# Altium PCB 9-Safety-Relay-PCB.PcbDoc
Units mm, origin at the board's own origin, x right, y up, seen from the top; angles counter-clockwise.
Board outline 160.02 x 88.58 mm, 2 copper layers (Top Layer, Bottom Layer); 13 components, 41 nets, 146 pads, 16 vias.
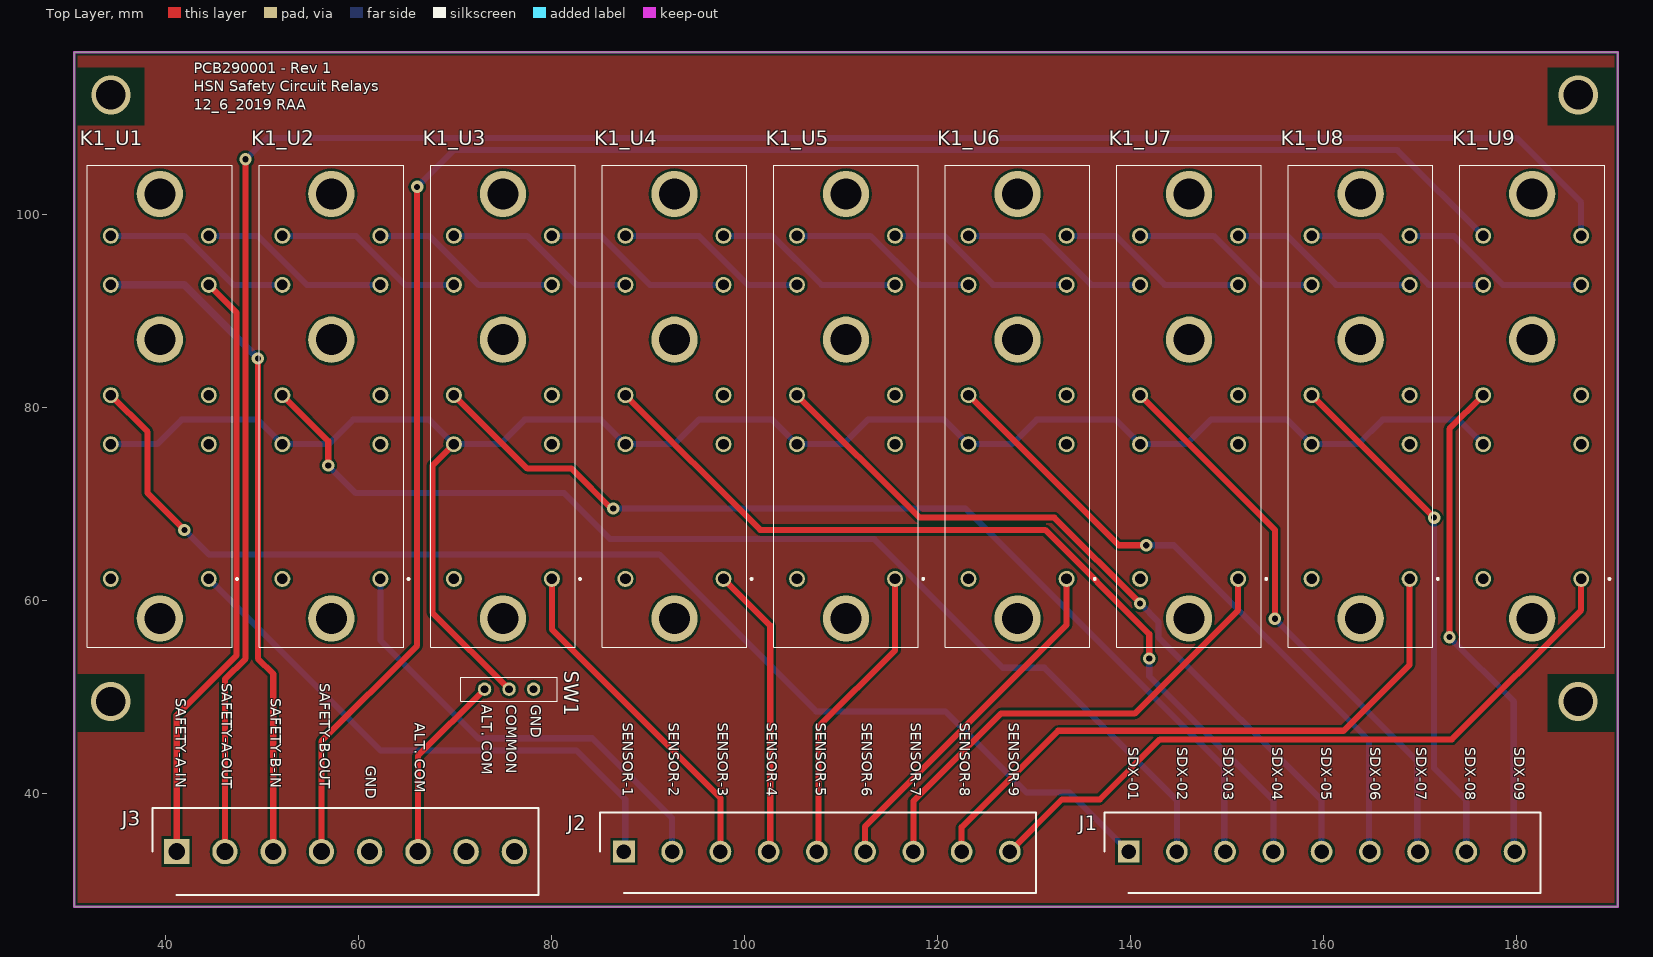
[diagram p0: Top Layer view]
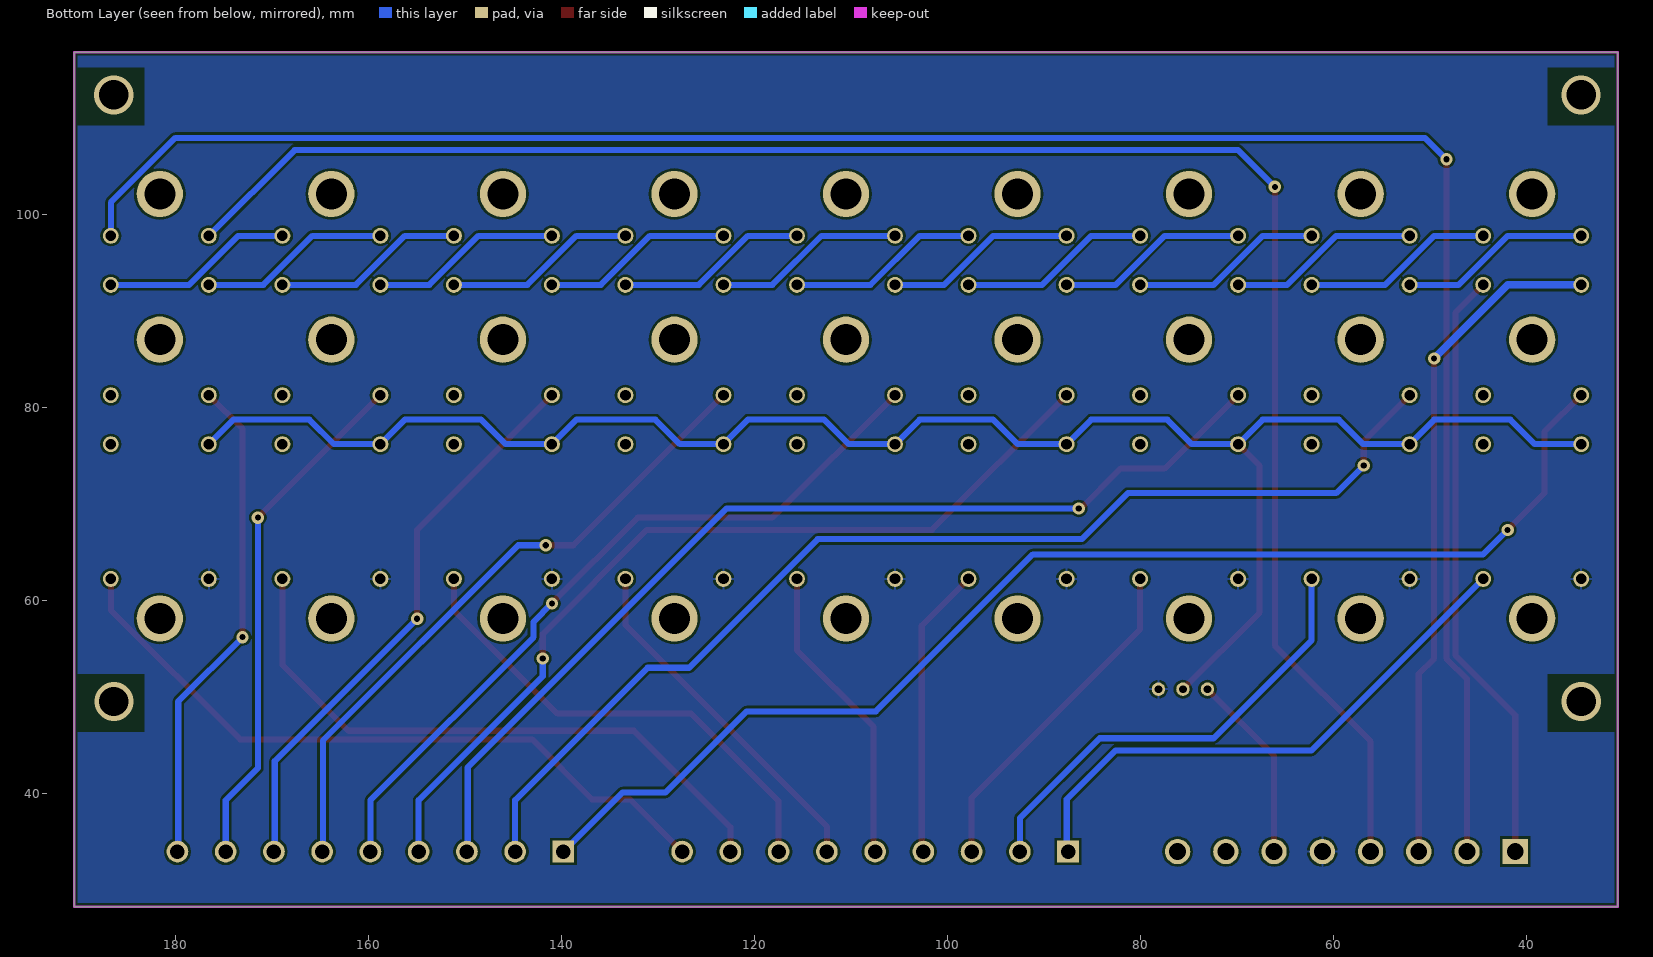
[diagram p1: Bottom Layer view, seen from below]
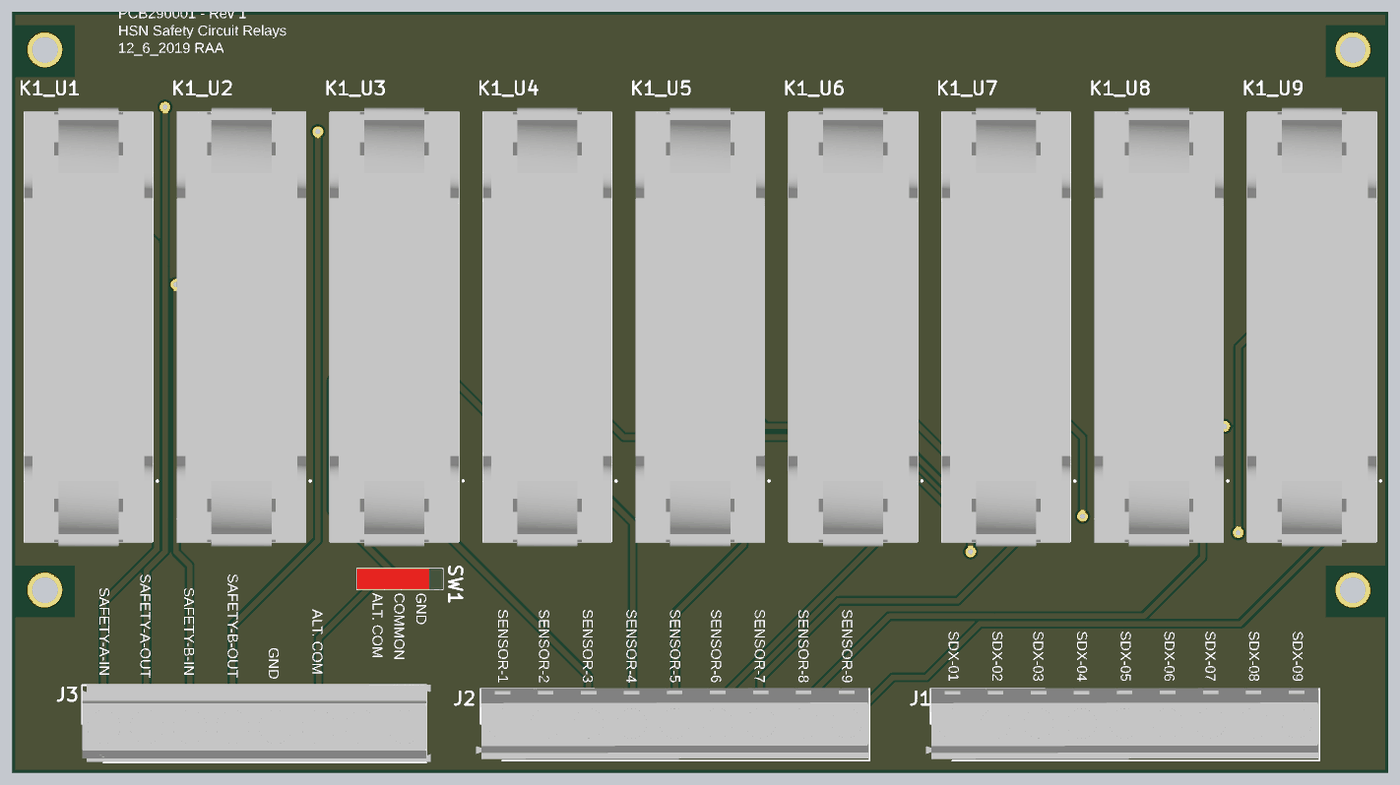
[diagram p2: 3D render of the assembled board from above, using the file's embedded part models]

## Layer stack, top to bottom
Top Solder: solder mask 0.0102, Solder Resist, Dk 3.5
Top Layer: signal copper 0.0356
Dielectric 1: dielectric 0.32, FR-4, Dk 4.8
Bottom Layer: signal copper 0.0356
Bottom Solder: solder mask 0.0102, Solder Resist, Dk 3.5

## Board outline
30.48,116.84 190.5,116.84 190.5,28.258 30.48,28.258

## Design rules (kind name [scope] priority, off if disabled: settings)
Clearance [All] p1: gap=0.254 ignorepadtopadclearanceinfootprint=FALSE except(0: Arc-Hole Track-Hole SMDPad-Hole THPad-Hole Via-Hole Fill-Hole Poly-Hole Region-Hole Text-Hole)
PolygonConnect [All] p1: connectstyle=Relief reliefconductorwidth=0.254 reliefentries=4 polygonreliefangle="90 Angle" airgapwidth=0.254
RoutingVias [All] p1: holewidth=0.635 width=1.27 viastyle="Through Hole" minholewidth=0.254 minwidth=1.016 maxholewidth=1.27 maxwidth=2.54
SolderMaskExpansion [All] p1: expansion=0.102
Width [All] p1: maxlimit=3.81 minlimit=0.254 preferedwidth=0.635 minimp=50.000000 maximp=50.000000 favimp=50.000000
30 further rules are at their usual default settings.

## Classes and differential pairs
component class U9: K1_U9
component class U8: K1_U8
channel class Safety-Relay-SubSch: U1 U2 U3 U4 U5 U6 U7
component class U7: K1_U7
component class U6: K1_U6
component class U5: K1_U5
component class U4: K1_U4
component class U3: K1_U3
component class U2: K1_U2
component class U1: K1_U1
component class Safety-Relay-Schematic: J3 SW1

## Components (designator, comment, footprint, x,y, rotation, side; value= is the part's Value field where it differs from the comment)
J1 "282836-9" SHDR9W130P0X500_1X9_4500X820X1020P 139.782,33.972 r0 top
J2 "282836-9" SHDR9W130P0X500_1X9_4500X820X1020P 87.472,33.972 r0 top
J3 "796683-8" SHDR8W110P0X500_1X8_4000X900X1520P 41.12,33.972 r0 top
K1_U1 "P7SA-10P_(G7SA-3A1B)" P7SA10PG7SA2A2B 39.37,80.13 r90 top (schematic designator K1)
K1_U2 "P7SA-10P_(G7SA-3A1B)" P7SA10PG7SA2A2B 57.15,80.13 r90 top (schematic designator K1)
K1_U3 "P7SA-10P_(G7SA-3A1B)" P7SA10PG7SA2A2B 74.93,80.13 r90 top (schematic designator K1)
K1_U4 "P7SA-10P_(G7SA-3A1B)" P7SA10PG7SA2A2B 92.71,80.13 r90 top (schematic designator K1)
K1_U5 "P7SA-10P_(G7SA-3A1B)" P7SA10PG7SA2A2B 110.49,80.13 r90 top (schematic designator K1)
K1_U6 "P7SA-10P_(G7SA-3A1B)" P7SA10PG7SA2A2B 128.27,80.13 r90 top (schematic designator K1)
K1_U7 "P7SA-10P_(G7SA-3A1B)" P7SA10PG7SA2A2B 146.05,80.13 r90 top (schematic designator K1)
K1_U8 "P7SA-10P_(G7SA-3A1B)" P7SA10PG7SA2A2B 163.83,80.13 r90 top (schematic designator K1)
K1_U9 "P7SA-10P_(G7SA-3A1B)" P7SA10PG7SA2A2B 181.61,80.13 r90 top (schematic designator K1)
SW1 "450301014042" 450301014042 75.565,50.8 r0 top

## Footprints (in the part's own frame and the unit in brackets; to place one, negate y for a bottom-side part, rotate by r counter-clockwise, add the part's x,y. Pads: shape width x height; smd on the part's side, far side on the other; paste and mask are expansions set on the pad)
450301014042 [mm] "10mm*2.5mm. SPDT, ON-ON, 2.54mm, horizontal type, THT, bulk"
  round 1.4 hole 0.8: 1(0,0) 2(-2.54,0) 3(2.54,0)
  silkscreen extent -5,-1.25 5,1.25, body extent -5,-1.25 5,1.25, height 6.4
P7SA10PG7SA2A2B [mm]
  round 1.65 hole 1.1: 1(-17.9,-5.08) 2(-3.93,-5.08) 3(1.15,-5.08) 4(12.58,-5.08) 5(17.66,-5.08) 6(17.66,5.08) 7(12.58,5.08) 8(1.15,5.08) 9(-3.93,5.08) 10(-17.9,5.08)
  round 4.8 hole 3.2: MH1(-22,0) MH2(6.9,0) MH3(22,0)
  silkscreen extent -25,-8.1 25,7.5, body extent -25.5,-7.5 25.51,7.5, height 40.71
SHDR8W110P0X500_1X8_4000X900X1520P [mm]
  rect 2.625x2.625 hole 1.75: 1(0,0)
  round 2.625 hole 1.75: 2(5,0) 3(10,0) 4(15,0) 5(20,0) 6(25,0) 7(30,0) 8(35,0)
  silkscreen extent -2.5,-4.5 37.5,4.5, body extent -2.47,-4.43 38.03,4.57, height 15.01
SHDR9W130P0X500_1X9_4500X820X1020P [mm]
  rect 2.25x2.25 hole 1.5: 1(0,0)
  round 2.25 hole 1.5: 2(5,0) 3(10,0) 4(15,0) 5(20,0) 6(25,0) 7(30,0) 8(35,0) 9(40,0)
  silkscreen extent -2.5,-4.3 42.7,4.05, body extent -3.05,-4.1 42.56,4.17, height 10

## Part data
J1 J2: "Connector", Manufacturer_Name="TE Connectivity", Mouser Part Number=571-282836-9, RS Part Number=3617746, Allied_Number=70285523, Allied Price/Stock=https://www.alliedelec.com/te-connectivity-282836-9/70285523/, Datasheet Link=http://www.te.com/commerce/DocumentDelivery/DDEController?Action=srchrtrv&DocNm=282836&DocType=Customer+Drawing&DocLang=English, Height=10.2mm, Manufacturer_Part_Number=282836-9, Mouser Price/Stock=https://www.mouser.com/Search/Refine.aspx?Keyword=571-282836-9, RS Price/Stock=http://uk.rs-online.com/web/p/products/3617746
J3: "Connector", Manufacturer_Name="TE Connectivity", Mouser Part Number=571-796683-8, Datasheet Link=http://www.te.com/commerce/DocumentDelivery/DDEController?Action=srchrtrv&DocNm=796683&DocType=Customer+Drawing&DocLang=English, Height=15.2mm, Manufacturer_Part_Number=796683-8, Mouser Price/Stock=https://www.mouser.com/Search/Refine.aspx?Keyword=571-796683-8
K1_U1 K1_U2 K1_U3 K1_U4 K1_U5 K1_U6 K1_U7 K1_U8 K1_U9: "Relay or Contactor", Manufacturer_Name="Omron Electronics", Manufacturer_Part_Number="P7SA-10P (G7SA-3A1B)", Mouser Part Number=653-P7SA-10P, Allied_Number=70033653, Allied Price/Stock=https://www.alliedelec.com/omron-safety-sti-p7sa-10p/70033653/, Datasheet Link=http://www.ia.omron.com/data_pdf/cat/g7sa_j120-e1_12_1_csm1269.pdf, Mouser Price/Stock=https://www.mouser.com/Search/Refine.aspx?Keyword=653-P7SA-10P
SW1: library part CMP-1466-00001-1, "WS-SLTV 10mm*2.5mm, SPDT, ON-ON, 2.54mm, straight type, THT, Mini Slide Switch, 3 pins", Manufacturer="Wuerth Elektronik", ComponentLink1Description="Manufacturer URL", ComponentLink1URL=http://www.we-online.com, ComponentLink2Description=Datasheet, ComponentLink2URL=http://katalog.we-online.de/em/datasheet/450301014042.pdf, NoPins=06, PackageReference=450301014042, PartNumber=450301014042

## Via types
v1: diameter 1.27, hole 0.635, Top Layer to Bottom Layer, 12 vias
v2: diameter 4.064, hole 3.048, Top Layer to Bottom Layer, 4 vias

## Nets (pads, with @x,y where several pads share a name; then routed paths per layer and width w, separated by ;. In a path a pad name is that pad's centre, name@x,y a point inside that pad or via, vN(x,y) a via of type N, cw(c..) or ccw(c..) an arc to the next point about the centre after c; other vN are vias at no path point)
COM-IN: J3.6 SW1.2 | length 19.7
  Top Layer w0.635: J3.6 66.12,43.895 SW1.2
COMMON: K1_U1.9 K1_U2.9 K1_U3.9 K1_U4.9 K1_U5.9 K1_U6.9 K1_U7.9 K1_U8.9 K1_U9.9 SW1.1 | length 188.7
  Top Layer w0.635: K1_U3.9 67.627,73.977 67.627,58.737 SW1.1
  Bottom Layer w0.635: K1_U1.9 39.098,76.2 41.638,78.74 49.53,78.74 K1_U2.9 56.878,76.2 59.418,78.74 67.31,78.74 K1_U3.9 74.658,76.2 77.198,78.74 85.09,78.74 K1_U4.9 92.71,76.2 95.25,78.74 102.87,78.74 K1_U5.9 110.218,76.2 112.758,78.74 120.65,78.74 K1_U6.9 127.709,76.2 130.249,78.74 138.43,78.74 K1_U7.9 145.778,76.2 148.318,78.74 156.21,78.74 K1_U8.9 163.558,76.2 166.098,78.74 173.99,78.74 K1_U9.9
GND: J3.5 K1_U1.10 K1_U2.10 K1_U3.10 K1_U4.10 K1_U5.10 K1_U6.10 K1_U7.10 K1_U8.10 K1_U9.10 SW1.3
NetK1_U1_5: K1_U1.5 K1_U2.4 | length 19.9
  Bottom Layer w0.635: K1_U1.5 49.53,97.79 54.61,92.71 K1_U2.4
NetK1_U1_6: K1_U1.6 K1_U2.7 | length 19.9
  Bottom Layer w0.635: K1_U1.6 41.91,97.79 46.99,92.71 K1_U2.7
NetK1_U2_5: K1_U2.5 K1_U3.4 | length 19.9
  Bottom Layer w0.635: K1_U2.5 67.31,97.79 72.39,92.71 K1_U3.4
NetK1_U2_6: K1_U2.6 K1_U3.7 | length 19.9
  Bottom Layer w0.635: K1_U2.6 59.69,97.79 64.77,92.71 K1_U3.7
NetK1_U3_5: K1_U3.5 K1_U4.4 | length 19.9
  Bottom Layer w0.635: K1_U3.5 85.09,97.79 90.17,92.71 K1_U4.4
NetK1_U3_6: K1_U3.6 K1_U4.7 | length 19.9
  Bottom Layer w0.635: K1_U3.6 77.47,97.79 82.55,92.71 K1_U4.7
NetK1_U4_5: K1_U4.5 K1_U5.4 | length 19.9
  Bottom Layer w0.635: K1_U4.5 102.87,97.79 107.95,92.71 K1_U5.4
NetK1_U4_6: K1_U4.6 K1_U5.7 | length 19.9
  Bottom Layer w0.635: K1_U4.6 95.25,97.79 100.33,92.71 K1_U5.7
NetK1_U5_5: K1_U5.5 K1_U6.4 | length 19.9
  Bottom Layer w0.635: K1_U5.5 120.65,97.79 125.73,92.71 K1_U6.4
NetK1_U5_6: K1_U5.6 K1_U6.7 | length 19.9
  Bottom Layer w0.635: K1_U5.6 113.03,97.79 118.11,92.71 K1_U6.7
NetK1_U6_5: K1_U6.5 K1_U7.4 | length 19.9
  Bottom Layer w0.635: K1_U6.5 138.43,97.79 143.51,92.71 K1_U7.4
NetK1_U6_6: K1_U6.6 K1_U7.7 | length 19.9
  Bottom Layer w0.635: K1_U6.6 130.81,97.79 135.89,92.71 K1_U7.7
NetK1_U7_5: K1_U7.5 K1_U8.4 | length 19.9
  Bottom Layer w0.635: K1_U7.5 156.21,97.79 161.29,92.71 K1_U8.4
NetK1_U7_6: K1_U7.6 K1_U8.7 | length 19.9
  Bottom Layer w0.635: K1_U7.6 148.59,97.79 153.67,92.71 K1_U8.7
NetK1_U8_5: K1_U8.5 K1_U9.4 | length 19.9
  Bottom Layer w0.635: K1_U8.5 173.492,97.79 178.572,92.71 K1_U9.4
NetK1_U8_6: K1_U8.6 K1_U9.7 | length 19.9
  Bottom Layer w0.635: K1_U8.6 165.805,97.79 170.885,92.71 K1_U9.7
SAFETY-A-IN: J3.1 K1_U1.4 | length 62.5
  Top Layer w0.635: J3.1 41.12,48.105 47.307,54.292 47.307,89.852 K1_U1.4
SAFETY-A-OUT: J3.2 K1_U9.5 | length 218.2
  Top Layer w0.635: J3.2 46.12,51.835 48.26,53.975 48.26,103.505 v1(48.26,105.727)
  Bottom Layer w0.635: v1(48.26,105.727) 50.482,107.95 179.992,107.95 186.69,101.252 K1_U9.5
SAFETY-B-IN: J3.3 K1_U1.7 | length 70.2
  Top Layer w0.635: v1(49.53,85.09) 49.53,53.975 51.12,52.385 J3.3
  Bottom Layer w0.762: K1_U1.7 41.91,92.71 v1(49.53,85.09)
SAFETY-B-OUT: J3.4 K1_U9.6 | length 188.8
  Top Layer w0.635: J3.4 56.12,45.399 66.04,55.319 v1(66.04,102.87)
  Bottom Layer w0.635: v1(66.04,102.87) 69.85,106.68 167.64,106.68 K1_U9.6
SDX-O1: J1.1 K1_U1.8 | length 128.8
  Top Layer w0.635: K1_U1.8 38.1,77.47 38.1,71.12 v1(41.91,67.31)
  Bottom Layer w0.635: v1(41.91,67.31) 44.45,64.77 91.123,64.77 107.392,48.501 120.797,48.501 129.196,40.103 133.652,40.103 J1.1
SDX-O2: J1.2 K1_U2.8 | length 116.9
  Top Layer w0.635: K1_U2.8 56.832,76.517 v1(56.832,73.977)
  Bottom Layer w0.635: v1(56.832,73.977) 59.69,71.12 81.28,71.12 86.042,66.358 113.417,66.358 126.752,53.023 131.048,53.023 144.782,39.288 J1.2
SDX-O3: J1.3 K1_U3.8 | length 104.5
  Top Layer w0.635: K1_U3.8 77.47,73.66 82.052,73.66 v1@86.234,69.478
  Bottom Layer w0.635: v1(86.36,69.532) 122.872,69.532 149.7,42.705 J1.3@149.7,33.972
SDX-O4: J1.4 K1_U4.8 | length 92.4
  Top Layer w0.635: K1_U4.8 101.6,67.31 131.127,67.31 141.922,56.515 v1(141.922,53.975)
  Bottom Layer w0.635: v1(141.922,53.975) 141.922,52.148 154.782,39.288 J1.4
SDX-O5: J1.5 K1_U5.8 | length 78
  Top Layer w0.635: K1_U5.8 118.11,68.58 132.08,68.58 v1(140.97,59.69)
  Bottom Layer w0.635: v1(140.97,59.69) 142.875,57.785 142.875,56.195 159.782,39.288 J1.5
SDX-O6: J1.6 K1_U6.8 | length 67.8
  Top Layer w0.635: K1_U6.8 138.748,65.722 v1(141.605,65.722)
  Bottom Layer w0.635: v1(141.605,65.722) 144.463,65.722 164.7,45.485 J1.6@164.7,33.972
SDX-O7: J1.7 K1_U7.8 | length 59.2
  Top Layer w0.635: K1_U7.8 154.94,67.31 v1(154.94,58.102)
  Bottom Layer w0.635: v1(154.94,58.102) 169.7,43.342 J1.7@169.7,33.972
SDX-O8: J1.8 K1_U8.8 | length 53.9
  Top Layer w0.635: K1_U8.8 v1(171.45,68.58)
  Bottom Layer w0.635: v1(171.45,68.58) 171.45,42.62 174.783,39.288 J1.8
SDX-O9: J1.9 K1_U9.8 | length 51.5
  Top Layer w0.635: v1(173.037,56.197) 173.037,77.787 K1_U9.8
  Bottom Layer w0.635: v1(173.037,56.197) 179.7,49.535 J1.9@179.7,33.972
SENSOR-1: J2.1 K1_U1.1 | length 58
  Bottom Layer w0.635: K1_U1.1 62.23,44.45 82.555,44.45 87.615,39.39 J2.1@87.615,33.972
SENSOR-2: J2.2 K1_U2.1 | length 47.7
  Bottom Layer w0.635: K1_U2.1 62.23,55.88 72.39,45.72 84.193,45.72 92.472,37.441 J2.2
SENSOR-3: J2.3 K1_U3.1 | length 35.5
  Top Layer w0.635: K1_U3.1 80.01,56.995 97.472,39.533 J2.3
SENSOR-4: J2.4 K1_U4.1 | length 30.3
  Top Layer w0.635: K1_U4.1 102.635,57.385 J2.4@102.635,33.972
SENSOR-5: J2.5 K1_U5.1 | length 31.5
  Top Layer w0.635: J2.5@107.635,33.972 107.635,46.893 115.57,54.828 K1_U5.1
SENSOR-6: J2.6 K1_U6.1 | length 36.9
  Top Layer w0.635: J2.6 112.473,36.59 133.35,57.468 K1_U6.1
SENSOR-7: J2.7 K1_U7.1 | length 50.3
  Top Layer w0.635: J2.7 117.473,39.207 126.54,48.275 140.397,48.275 151.13,59.008 K1_U7.1
SENSOR-8: J2.8 K1_U8.1 | length 64.8
  Top Layer w0.635: J2.8 122.473,36.501 132.467,46.495 162.065,46.495 168.91,53.34 K1_U8.1
SENSOR-9: J2.9 K1_U9.1 | length 72.8
  Top Layer w0.635: J2.9 132.87,39.37 136.792,39.37 143.028,45.606 173.288,45.606 186.69,59.008 K1_U9.1
pads on no net: J3.7 J3.8 K1_U1.2 K1_U1.3 K1_U1.MH1 K1_U1.MH2 K1_U1.MH3 K1_U2.2 K1_U2.3 K1_U2.MH1 K1_U2.MH2 K1_U2.MH3 K1_U3.2 K1_U3.3 K1_U3.MH1 K1_U3.MH2 K1_U3.MH3 K1_U4.2 K1_U4.3 K1_U4.MH1 K1_U4.MH2 K1_U4.MH3 K1_U5.2 K1_U5.3 K1_U5.MH1 K1_U5.MH2 K1_U5.MH3 K1_U6.2 K1_U6.3 K1_U6.MH1 K1_U6.MH2 K1_U6.MH3 K1_U7.2 K1_U7.3 K1_U7.MH1 K1_U7.MH2 K1_U7.MH3 K1_U8.2 K1_U8.3 K1_U8.MH1 K1_U8.MH2 K1_U8.MH3 K1_U9.2 K1_U9.3 K1_U9.MH1 K1_U9.MH2 K1_U9.MH3
copper on no net:
  other v2: 34.29,49.53 186.373,49.53 34.294,112.395 186.377,112.395

## Polygon pours and split planes (outlines as drawn)
GND on Bottom Layer "Bottom Layer-GND" (solid, pour order 2): 30.48,116.84 190.5,116.84 190.5,28.258 30.48,28.258
no net on Top Layer "Top Layer-+24VDC" (solid, pour order 0): 190.5,28.258 190.5,116.84 30.48,116.84 30.48,28.258

## Keep-outs
Top Layer:
  region: 180.34,116.84
Keep-Out Layer:
  the board outline again, w0.254

## Other copper
Top Layer:
  pour cut-out: 183.197,109.22 190.5,109.22 190.5,115.252 183.197,115.252
  pour cut-out: 183.197,46.355 190.5,46.355 190.5,52.387 183.197,52.387
  pour cut-out: 30.48,46.355 37.782,46.355 37.782,52.387 30.48,52.387
  pour cut-out: 30.48,109.22 37.782,109.22 37.782,115.252 30.48,115.252
Bottom Layer:
  pour cut-out: 183.197,109.22 190.5,109.22 190.5,115.252 183.197,115.252
  pour cut-out: 183.197,46.355 190.5,46.355 190.5,52.387 183.197,52.387
  pour cut-out: 30.48,46.355 37.782,46.355 37.782,52.387 30.48,52.387
  pour cut-out: 30.48,109.22 37.782,109.22 37.782,115.252 30.48,115.252

## Silkscreen, mask and mechanical layers (free items; w line width, h text height)
Top Overlay:
  text "PCB290001 - Rev 1 / HSN Safety Circuit Relays / 12_6_2019 RAA" at 42.862,110.49 h1.91
  text "SAFETY-A-OUT" at 45.402,51.435 h1.91 r270
  text "SAFETY-B-OUT" at 55.562,51.435 h1.91 r270
  text "SAFETY-A-IN" at 40.64,49.847 h1.91 r270
  text "SAFETY-B-IN" at 50.482,49.847 h1.91 r270
  text "ALT. COM" at 72.39,49.212 h1.91 r270
  text "COMMON" at 74.93,49.212 h1.91 r270
  text "GND" at 77.47,49.212 h1.91 r270
  text "ALT. COM" at 65.405,47.307 h1.91 r270
  text "SENSOR-1" at 86.995,47.307 h1.91 r270
  text "SENSOR-2" at 91.757,47.307 h1.91 r270
  text "SENSOR-3" at 96.837,47.307 h1.91 r270
  text "SENSOR-4" at 101.917,47.307 h1.91 r270
  text "SENSOR-5" at 106.998,47.307 h1.91 r270
  text "SENSOR-6" at 111.76,47.307 h1.91 r270
  text "SENSOR-7" at 116.84,47.307 h1.91 r270
  text "SENSOR-8" at 121.92,47.307 h1.91 r270
  text "SENSOR-9" at 127,47.307 h1.91 r270
  text "SDX-01" at 139.382,44.767 h1.91 r270
  text "SDX-02" at 144.463,44.767 h1.91 r270
  text "SDX-03" at 149.225,44.767 h1.91 r270
  text "SDX-04" at 154.305,44.767 h1.91 r270
  text "SDX-05" at 159.385,44.767 h1.91 r270
  text "SDX-06" at 164.465,44.767 h1.91 r270
  text "SDX-07" at 169.227,44.767 h1.91 r270
  text "SDX-08" at 174.308,44.767 h1.91 r270
  text "SDX-09" at 179.387,44.767 h1.91 r270
  text "GND" at 60.325,42.862 h1.91 r270